# Altium PCB Test.PcbDoc (part 3 of 3)
Units mil, origin at the board's own origin, x right, y up, seen from the top; angles counter-clockwise.
Board outline 6000 x 4000 mil, 2 copper layers (Top Layer, Bottom Layer); 135 components, 102 nets, 575 pads, 1 vias.
Unrouted connection lines stored in the file: 317.
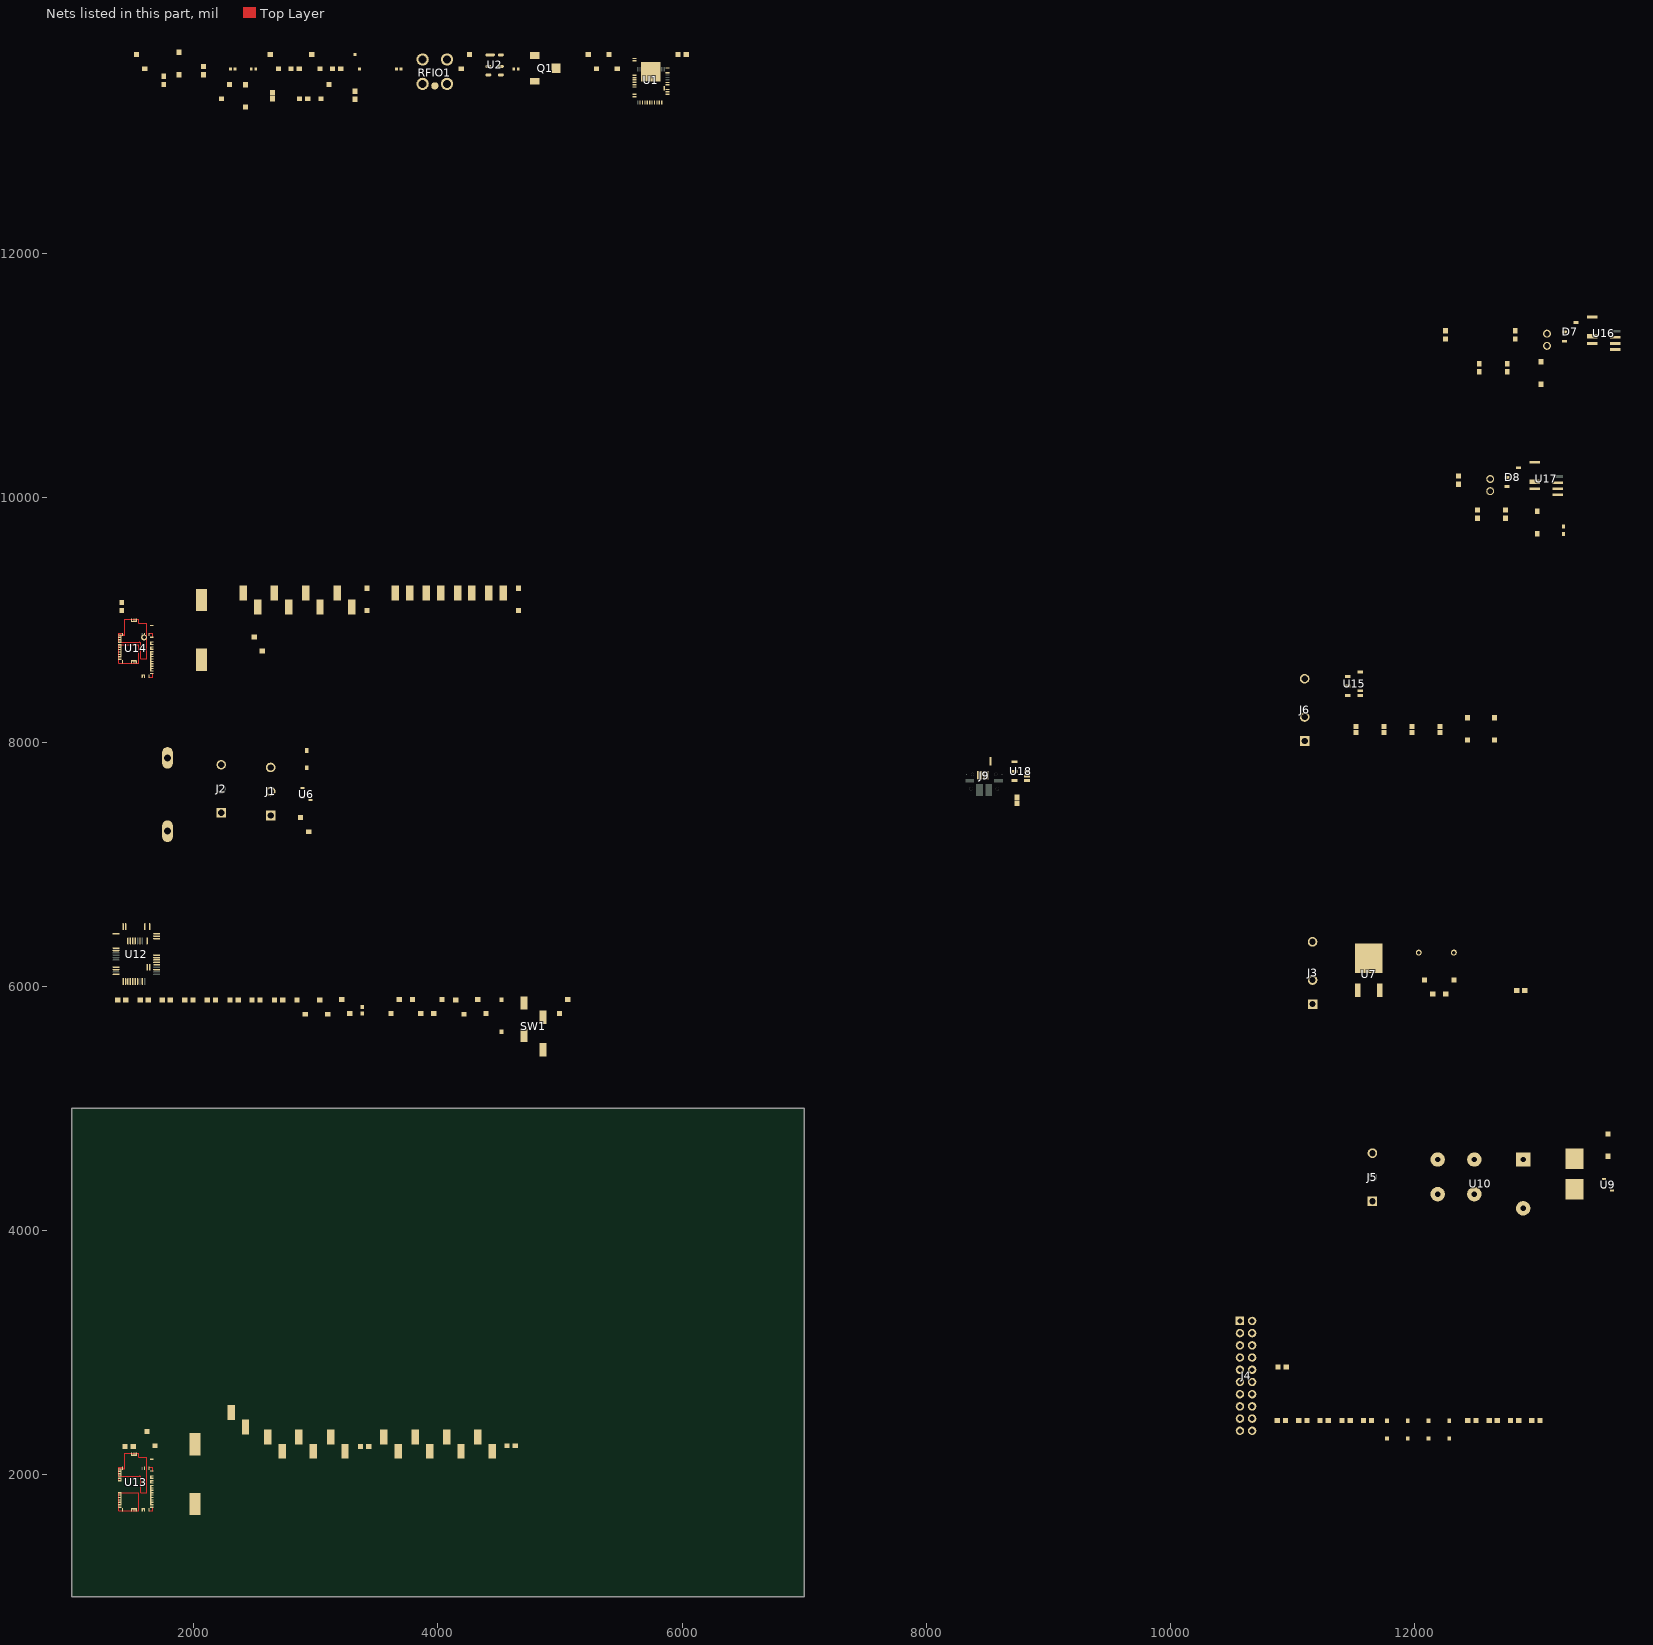
[diagram p2: the nets of this part, all layers, seen from the top]

## Part data (continued)
R1: Case/Package=0603, Case Code (Metric)=1608, Manufacturer=Vishay, Manufacturer Part Number=CRCW0603100KFKEA, Max Operating Temperature=155°C, Max Power Dissipation=100mW, Min Operating Temperature=-55°C, Package Quantity=10, Resistance=100k, Temperature Coefficient=100ppm/°C, Tolerance=1%, Voltage Rating=75V, Case Code (Imperial)=0603, ComponentLink1Description=https://datasheet.ciiva.com/2465/dcrcwe3-2465525.pdf, ComponentLink1URL=https://datasheet.ciiva.com/2465/dcrcwe3-2465525.pdf, ComponentLink2Description=https://datasheet.ciiva.com/7777/1697337-7777269.pdf, ComponentLink2URL=https://datasheet.ciiva.com/7777/1697337-7777269.pdf, ComponentLink3Description=https://datasheet.ciiva.com/15159/getdatasheetpartid-93113-15159925.pdf, ComponentLink3URL=https://datasheet.ciiva.com/15159/getdatasheetpartid-93113-15159925.pdf, ComponentLink4Description=https://datasheet.ciiva.com/46441/1720486-46441605.pdf, ComponentLink4URL=https://datasheet.ciiva.com/46441/1720486-46441605.pdf, ComponentLink5Description=https://datasheet.ciiva.com/2465/dcrcwe3-2465526.pdf, ComponentLink5URL=https://datasheet.ciiva.com/2465/dcrcwe3-2465526.pdf, ComponentLink6Description=https://datasheet.ciiva.com/2465/dcrcwe3-2465527.pdf, ComponentLink6URL=https://datasheet.ciiva.com/2465/dcrcwe3-2465527.pdf, ComponentLink7Description=https://datasheet.ciiva.com/8340/dcrcwe3-8340199.pdf, ComponentLink7URL=https://datasheet.ciiva.com/8340/dcrcwe3-8340199.pdf, ComponentLink8Description=https://datasheet.ciiva.com/16725/70201119-16725223.pdf, ComponentLink8URL=https://datasheet.ciiva.com/16725/70201119-16725223.pdf, ComponentLink9Description=https://datasheet.ciiva.com/8340/dcrcwe3-8340201.pdf, ComponentLink9URL=https://datasheet.ciiva.com/8340/dcrcwe3-8340201.pdf, ComponentLink10Description=https://datasheet.ciiva.com/7791/66915-7791994.pdf, ComponentLink10URL=https://datasheet.ciiva.com/7791/66915-7791994.pdf, ComponentLink11Description=https://datasheet.ciiva.com/5545/dcrcwe3-109170-5545100.pdf, ComponentLink11URL=https://datasheet.ciiva.com/5545/dcrcwe3-109170-5545100.pdf, ComponentLink12Description=https://datasheet.ciiva.com/11809/0900766b80d98afc-11809004.pdf, ComponentLink12URL=https://datasheet.ciiva.com/11809/0900766b80d98afc-11809004.pdf, ComponentLink13Description=https://datasheet.ciiva.com/26317/fld-crcw-e3-data-en-26317165.pdf, ComponentLink13URL=https://datasheet.ciiva.com/26317/fld-crcw-e3-data-en-26317165.pdf, ComponentLink14Description=https://datasheet.ciiva.com/16941/dcrcw-16941311.pdf, ComponentLink14URL=https://datasheet.ciiva.com/16941/dcrcw-16941311.pdf, Composition="Thick Film", Contact Plating=Tin,Lead, Depth=0.85mm, Height=0.45mm, Lead Free="Lead Free", Length=1.55mm, Military Standard=Not, Number of Pins=2, Number of Terminations=2, Packaging="Tape and Reel", Power Rating=100mW, Radiation Hardening=No, REACH SVHC=Unknown, Stock 1=0, Supplier 1="Future Electronics", Supplier Part Number 1=CRCW0603100KFKEA, Termination=SMD/SMT, Voltage Rating (DC)=75V, Weight=7.1E-05oz, Width=0.033inch
R2 R3 R10 R12 R23 R26: Resistance=NC
R4 R5 R17 R18 R19 R20 R21 R27 R28 R31 R34 R35 R36 R37 R38: Case/Package=0603, Case Code (Metric)=1608, Manufacturer=Panasonic, Manufacturer Part Number=ERJ-3EKF1002V, Max Operating Temperature=155°C, Max Power Dissipation=100mW, Min Operating Temperature=-55°C, Package Quantity=1, Resistance=10k, Supplier Part Number 1=P10.0KHTR-ND, Temperature Coefficient=100ppm/°C, Tolerance=1%, Voltage Rating=75V, Case Code (Imperial)=0603, ComponentLink1Description=https://datasheet.ciiva.com/16511/aoa0000ce2-16511861.pdf, ComponentLink1URL=https://datasheet.ciiva.com/16511/aoa0000ce2-16511861.pdf, ComponentLink2Description=https://datasheet.ciiva.com/46372/1678782-46372725.pdf, ComponentLink2URL=https://datasheet.ciiva.com/46372/1678782-46372725.pdf, ComponentLink3Description=https://datasheet.ciiva.com/28514/426256-28514198.pdf, ComponentLink3URL=https://datasheet.ciiva.com/28514/426256-28514198.pdf, ComponentLink4Description=https://datasheet.ciiva.com/9194/aoa0000ce2-9194199.pdf, ComponentLink4URL=https://datasheet.ciiva.com/9194/aoa0000ce2-9194199.pdf, ComponentLink5Description=https://datasheet.ciiva.com/7830/aoa0000ce2-7830729.pdf, ComponentLink5URL=https://datasheet.ciiva.com/7830/aoa0000ce2-7830729.pdf, ComponentLink6Description=https://datasheet.ciiva.com/17212/aoa0000ce2-17212105.pdf, ComponentLink6URL=https://datasheet.ciiva.com/17212/aoa0000ce2-17212105.pdf, ComponentLink7Description=https://datasheet.ciiva.com/30208/aoa0000ce2-30208985.pdf, ComponentLink7URL=https://datasheet.ciiva.com/30208/aoa0000ce2-30208985.pdf, ComponentLink8Description=https://datasheet.ciiva.com/48530/aoa0000ce2-48530988.pdf, ComponentLink8URL=https://datasheet.ciiva.com/48530/aoa0000ce2-48530988.pdf, ComponentLink9Description=https://datasheet.ciiva.com/24070/aoa0000ce2-24070318.pdf, ComponentLink9URL=https://datasheet.ciiva.com/24070/aoa0000ce2-24070318.pdf, ComponentLink10Description=https://datasheet.ciiva.com/16759/70260748-16759807.pdf, ComponentLink10URL=https://datasheet.ciiva.com/16759/70260748-16759807.pdf, Composition="Thick Film", Contact Plating=Tin, Depth=0.8mm, Height=0.45mm, Lead Free="Lead Free", Length=1.6mm, Military Standard=Not, Mount="Surface Mount", Number of Pins=2, Number of Terminations=2, Packaging="Tape and Reel", Power Rating=100mW, Pricing 1="5000=0.00751, 10000=0.00653, 25000=0.00573, 50000=0.00526, 125000=0.00515 (USD)", Radiation Hardening=No, REACH SVHC="No SVHC", Stock 1=0, Supplier 1=Digi-Key, Termination=SMD/SMT, Voltage Rating (DC)=75V, Width=0.031inch
R6: Case/Package=0603, Case Code (Metric)=1608, Manufacturer=Vishay, Manufacturer Part Number=CRCW06036K80FKEA, Max Operating Temperature=155°C, Max Power Dissipation=100mW, Min Operating Temperature=-55°C, Package Quantity=10, Resistance=6.8k, Supplier Part Number 1=541-6.80KHTR-ND, Temperature Coefficient=100ppm/°C, Tolerance=1%, Voltage Rating=75V, Case Code (Imperial)=0603, ComponentLink1Description=https://datasheet.ciiva.com/11811/0900766b80d98afc-11811920.pdf, ComponentLink1URL=https://datasheet.ciiva.com/11811/0900766b80d98afc-11811920.pdf, ComponentLink2Description=https://datasheet.ciiva.com/2465/dcrcwe3-2465684.pdf, ComponentLink2URL=https://datasheet.ciiva.com/2465/dcrcwe3-2465684.pdf, ComponentLink3Description=https://datasheet.ciiva.com/2465/dcrcwe3-2465685.pdf, ComponentLink3URL=https://datasheet.ciiva.com/2465/dcrcwe3-2465685.pdf, ComponentLink4Description=https://datasheet.ciiva.com/2465/dcrcwe3-2465686.pdf, ComponentLink4URL=https://datasheet.ciiva.com/2465/dcrcwe3-2465686.pdf, ComponentLink5Description=https://datasheet.ciiva.com/26314/fld-crcw-e3-data-en-26314745.pdf, ComponentLink5URL=https://datasheet.ciiva.com/26314/fld-crcw-e3-data-en-26314745.pdf, ComponentLink6Description=https://datasheet.ciiva.com/16771/70201119-16771274.pdf, ComponentLink6URL=https://datasheet.ciiva.com/16771/70201119-16771274.pdf, ComponentLink7Description=https://datasheet.ciiva.com/22870/70201119-22870027.pdf, ComponentLink7URL=https://datasheet.ciiva.com/22870/70201119-22870027.pdf, ComponentLink8Description=https://datasheet.ciiva.com/3257/dcrcwe3-3257852.pdf, ComponentLink8URL=https://datasheet.ciiva.com/3257/dcrcwe3-3257852.pdf, ComponentLink9Description=https://datasheet.ciiva.com/7673/1697337-7673148.pdf, ComponentLink9URL=https://datasheet.ciiva.com/7673/1697337-7673148.pdf, ComponentLink10Description=https://datasheet.ciiva.com/3257/dcrcwe3-3257853.pdf, ComponentLink10URL=https://datasheet.ciiva.com/3257/dcrcwe3-3257853.pdf, ComponentLink11Description=https://datasheet.ciiva.com/16508/dcrcwe3-16508431.pdf, ComponentLink11URL=https://datasheet.ciiva.com/16508/dcrcwe3-16508431.pdf, Composition="Thick Film", Contact Plating=Tin, Depth=0.85mm, Height=0.45mm, Lead Free="Lead Free", Length=1.55mm, Military Standard=Not, Number of Terminations=2, Packaging="Tape and Reel", Power Rating=100mW, Pricing 1="5000=0.00497, 10000=0.00432, 25000=0.00405 (USD)", Radiation Hardening=No, REACH SVHC=Unknown, Stock 1=0, Supplier 1=Digi-Key, Termination=SMD/SMT, Voltage Rating (DC)=75V, Weight=7.1E-05oz, Width=0.033inch
R7: Case/Package=0603, Case Code (Metric)=1608, Manufacturer="Vishay Dale", Manufacturer Part Number=CRCW06031R00FKEA, Max Operating Temperature=155°C, Max Power Dissipation=100mW, Min Operating Temperature=-55°C, Package Quantity=10, Resistance=1, Supplier Part Number 1=541-1.00HHTR-ND, Temperature Coefficient=100ppm/°C, Tolerance=1%, Voltage Rating=75V, Case Code (Imperial)=0603, ComponentLink1Description=https://datasheet.ciiva.com/16396/aoa0000ce3-16396837.pdf, ComponentLink1URL=https://datasheet.ciiva.com/16396/aoa0000ce3-16396837.pdf, ComponentLink2Description=https://datasheet.ciiva.com/28691/391509-28691973.pdf, ComponentLink2URL=https://datasheet.ciiva.com/28691/391509-28691973.pdf, ComponentLink3Description=https://datasheet.ciiva.com/16784/70068852-16784839.pdf, ComponentLink3URL=https://datasheet.ciiva.com/16784/70068852-16784839.pdf, ComponentLink4Description=https://datasheet.ciiva.com/9117/aoa0000ce3-9117368.pdf, ComponentLink4URL=https://datasheet.ciiva.com/9117/aoa0000ce3-9117368.pdf, ComponentLink5Description=https://datasheet.ciiva.com/11810/0900766b80eefa12-11810728.pdf, ComponentLink5URL=https://datasheet.ciiva.com/11810/0900766b80eefa12-11810728.pdf, ComponentLink6Description=https://datasheet.ciiva.com/24165/aoa0000ce3-72189-24165336.pdf, ComponentLink6URL=https://datasheet.ciiva.com/24165/aoa0000ce3-72189-24165336.pdf, ComponentLink7Description=https://datasheet.ciiva.com/30060/6aoa0000ce3-30060648.pdf, ComponentLink7URL=https://datasheet.ciiva.com/30060/6aoa0000ce3-30060648.pdf, ComponentLink8Description=https://datasheet.ciiva.com/6138/391509-6138777.pdf, ComponentLink8URL=https://datasheet.ciiva.com/6138/391509-6138777.pdf, ComponentLink9Description=https://datasheet.ciiva.com/16766/70068852-16766778.pdf, ComponentLink9URL=https://datasheet.ciiva.com/16766/70068852-16766778.pdf, ComponentLink10Description=https://datasheet.ciiva.com/16853/aoa0000ce3-16853436.pdf, ComponentLink10URL=https://datasheet.ciiva.com/16853/aoa0000ce3-16853436.pdf, ComponentLink11Description=https://datasheet.ciiva.com/43455/391509-43455868.pdf, ComponentLink11URL=https://datasheet.ciiva.com/43455/391509-43455868.pdf, ComponentLink12Description=https://datasheet.ciiva.com/28547/391509-28547230.pdf, ComponentLink12URL=https://datasheet.ciiva.com/28547/391509-28547230.pdf, ComponentLink13Description=https://datasheet.ciiva.com/7792/1359337-7792119.pdf, ComponentLink13URL=https://datasheet.ciiva.com/7792/1359337-7792119.pdf, ComponentLink14Description=https://datasheet.ciiva.com/2465/dcrcwe3-2465528.pdf, ComponentLink14URL=https://datasheet.ciiva.com/2465/dcrcwe3-2465528.pdf, ComponentLink15Description=https://datasheet.ciiva.com/2465/dcrcwe3-2465529.pdf, ComponentLink15URL=https://datasheet.ciiva.com/2465/dcrcwe3-2465529.pdf, ComponentLink16Description=https://datasheet.ciiva.com/3257/dcrcwe3-3257225.pdf, ComponentLink16URL=https://datasheet.ciiva.com/3257/dcrcwe3-3257225.pdf, ComponentLink17Description=https://datasheet.ciiva.com/2465/dcrcwe3-2465530.pdf, ComponentLink17URL=https://datasheet.ciiva.com/2465/dcrcwe3-2465530.pdf, ComponentLink18Description=https://datasheet.ciiva.com/3257/dcrcwe3-3257226.pdf, ComponentLink18URL=https://datasheet.ciiva.com/3257/dcrcwe3-3257226.pdf, ComponentLink19Description=https://datasheet.ciiva.com/16883/dcrcwe3-16883290.pdf, ComponentLink19URL=https://datasheet.ciiva.com/16883/dcrcwe3-16883290.pdf, ComponentLink20Description=https://datasheet.ciiva.com/16768/70201119-16768957.pdf, ComponentLink20URL=https://datasheet.ciiva.com/16768/70201119-16768957.pdf, ComponentLink21Description=https://datasheet.ciiva.com/28621/1747939-28621389.pdf, ComponentLink21URL=https://datasheet.ciiva.com/28621/1747939-28621389.pdf, ComponentLink22Description=https://datasheet.ciiva.com/5541/dcrcwe3-109170-5541726.pdf, ComponentLink22URL=https://datasheet.ciiva.com/5541/dcrcwe3-109170-5541726.pdf, Composition="Thick Film", Contact Plating=Tin, Depth=0.85mm, Height=0.02inch, Lead Free="Lead Free", Length=1.55mm, Military Standard=Not, Mount="Surface Mount", Number of Pins=2, Number of Terminations=2, Packaging="Tape and Reel", Power Rating=100mW, Pricing 1="5000=0.00497, 10000=0.00432, 25000=0.00405 (USD)", Radiation Hardening=No, REACH SVHC=Unknown, Stock 1=0, Supplier 1=Digi-Key, Termination=SMD/SMT, Voltage Rating (DC)=75V, Weight=7.1E-05oz, Width=0.033inch
R8: Case/Package=0603, Case Code (Metric)=1608, Manufacturer=Vishay, Manufacturer Part Number=CRCW0603110RFKEA, Max Operating Temperature=155°C, Max Power Dissipation=100mW, Min Operating Temperature=-55°C, Package Quantity=10, Resistance=110, Supplier Part Number 1=541-110HTR-ND, Temperature Coefficient=100ppm/°C, Tolerance=1%, Voltage Rating=75V, Case Code (Imperial)=0603, ComponentLink1Description=https://datasheet.ciiva.com/11809/0900766b80d98afc-11809778.pdf, ComponentLink1URL=https://datasheet.ciiva.com/11809/0900766b80d98afc-11809778.pdf, ComponentLink2Description=https://datasheet.ciiva.com/2525/dcrcwe3-2525299.pdf, ComponentLink2URL=https://datasheet.ciiva.com/2525/dcrcwe3-2525299.pdf, ComponentLink3Description=https://datasheet.ciiva.com/2525/dcrcwe3-2525300.pdf, ComponentLink3URL=https://datasheet.ciiva.com/2525/dcrcwe3-2525300.pdf, ComponentLink4Description=https://datasheet.ciiva.com/2525/dcrcwe3-2525301.pdf, ComponentLink4URL=https://datasheet.ciiva.com/2525/dcrcwe3-2525301.pdf, ComponentLink5Description=https://datasheet.ciiva.com/7822/1697337-7822981.pdf, ComponentLink5URL=https://datasheet.ciiva.com/7822/1697337-7822981.pdf, ComponentLink6Description=https://datasheet.ciiva.com/16758/70201119-16758821.pdf, ComponentLink6URL=https://datasheet.ciiva.com/16758/70201119-16758821.pdf, ComponentLink7Description=https://datasheet.ciiva.com/3256/dcrcwe3-3256966.pdf, ComponentLink7URL=https://datasheet.ciiva.com/3256/dcrcwe3-3256966.pdf, ComponentLink8Description=https://datasheet.ciiva.com/7822/1697337-7822982.pdf, ComponentLink8URL=https://datasheet.ciiva.com/7822/1697337-7822982.pdf, ComponentLink9Description=https://datasheet.ciiva.com/3256/dcrcwe3-3256967.pdf, ComponentLink9URL=https://datasheet.ciiva.com/3256/dcrcwe3-3256967.pdf, ComponentLink10Description=https://datasheet.ciiva.com/26316/fld-crcw-e3-data-en-26316567.pdf, ComponentLink10URL=https://datasheet.ciiva.com/26316/fld-crcw-e3-data-en-26316567.pdf, ComponentLink11Description=https://datasheet.ciiva.com/16787/70201119-16787496.pdf, ComponentLink11URL=https://datasheet.ciiva.com/16787/70201119-16787496.pdf, ComponentLink12Description=https://datasheet.ciiva.com/7792/125364-7792010.pdf, ComponentLink12URL=https://datasheet.ciiva.com/7792/125364-7792010.pdf, ComponentLink13Description=https://datasheet.ciiva.com/16885/dcrcwe3-16885194.pdf, ComponentLink13URL=https://datasheet.ciiva.com/16885/dcrcwe3-16885194.pdf, ComponentLink14Description=https://datasheet.ciiva.com/22674/1912744-22674701.pdf, ComponentLink14URL=https://datasheet.ciiva.com/22674/1912744-22674701.pdf, ComponentLink15Description=https://datasheet.ciiva.com/22707/1697337-22707342.pdf, ComponentLink15URL=https://datasheet.ciiva.com/22707/1697337-22707342.pdf, Composition="Thick Film", Contact Plating=Tin, Depth=0.85mm, Height=0.45mm, Lead Free="Lead Free", Length=1.55mm, Military Standard=Not, Mount="Surface Mount", Number of Pins=2, Number of Terminations=2, Packaging="Tape and Reel", Power Rating=100mW, Pricing 1="5000=0.00497, 10000=0.00432, 25000=0.00405 (USD)", Radiation Hardening=No, REACH SVHC=Unknown, Stock 1=35000, Supplier 1=Digi-Key, Termination=SMD/SMT, Voltage Rating (DC)=75V, Weight=7.1E-05oz, Width=0.033inch
R9: Case/Package=Axial, Manufacturer="Stackpole Electronics", Manufacturer Part Number=CFM12JT560R, Max Operating Temperature=155°C, Max Power Dissipation=500mW, Min Operating Temperature=-55°C, Package Quantity=5000, Resistance=560, Supplier Part Number 1=S560HTR-ND, Temperature Coefficient=-400ppm/°C, Tolerance=5%, ComponentLink1Description=https://www.seielect.com/Catalog/SEI-CF_CFM.pdf, ComponentLink1URL=https://www.seielect.com/Catalog/SEI-CF_CFM.pdf, Composition="Carbon Film", Contact Plating=Tin,Matte, Diameter=2.3mm, Lead Free="Lead Free", Length=0.256inch, Mount="Through Hole,Axial", Number of Terminations=2, Packaging="Tape and Reel", Pricing 1="5000=0.00703, 10000=0.00611, 25000=0.00537, 50000=0.00492, 125000=0.00482 (USD)", Radiation Hardening=No, Stock 1=0, Supplier 1=Digi-Key
R11: Case/Package=0603, Case Code (Metric)=1608, Manufacturer=Vishay, Manufacturer Part Number=CRCW060368R0FKEA, Max Operating Temperature=155°C, Max Power Dissipation=100mW, Min Operating Temperature=-55°C, Package Quantity=10, Resistance=68, Supplier Part Number 1=541-68.0HTR-ND, Temperature Coefficient=100ppm/°C, Tolerance=1%, Voltage Rating=75V, Case Code (Imperial)=0603, ComponentLink1Description=https://datasheet.ciiva.com/2494/dcrcwe3-2494368.pdf, ComponentLink1URL=https://datasheet.ciiva.com/2494/dcrcwe3-2494368.pdf, ComponentLink2Description=https://datasheet.ciiva.com/11809/0900766b80d98afc-11809013.pdf, ComponentLink2URL=https://datasheet.ciiva.com/11809/0900766b80d98afc-11809013.pdf, ComponentLink3Description=https://datasheet.ciiva.com/8337/dcrcwe3-8337350.pdf, ComponentLink3URL=https://datasheet.ciiva.com/8337/dcrcwe3-8337350.pdf, ComponentLink4Description=https://datasheet.ciiva.com/7777/1697337-7777608.pdf, ComponentLink4URL=https://datasheet.ciiva.com/7777/1697337-7777608.pdf, ComponentLink5Description=https://datasheet.ciiva.com/16770/70201119-16770904.pdf, ComponentLink5URL=https://datasheet.ciiva.com/16770/70201119-16770904.pdf, ComponentLink6Description=https://datasheet.ciiva.com/2494/dcrcwe3-2494366.pdf, ComponentLink6URL=https://datasheet.ciiva.com/2494/dcrcwe3-2494366.pdf, ComponentLink7Description=https://datasheet.ciiva.com/22870/70201119-22870302.pdf, ComponentLink7URL=https://datasheet.ciiva.com/22870/70201119-22870302.pdf, ComponentLink8Description=https://datasheet.ciiva.com/2494/dcrcwe3-2494367.pdf, ComponentLink8URL=https://datasheet.ciiva.com/2494/dcrcwe3-2494367.pdf, ComponentLink9Description=https://datasheet.ciiva.com/16200/dcrcw-16200591.pdf, ComponentLink9URL=https://datasheet.ciiva.com/16200/dcrcw-16200591.pdf, Composition="Thick Film", Contact Plating=Tin, Depth=0.85mm, Height=0.45mm, Lead Free="Lead Free", Length=1.55mm, Military Standard=Not, Number of Terminations=2, Packaging="Tape and Reel", Power Rating=100mW, Pricing 1="5000=0.00497, 10000=0.00432, 25000=0.00405 (USD)", Radiation Hardening=No, REACH SVHC=Unknown, Stock 1=0, Supplier 1=Digi-Key, Termination=SMD/SMT, Voltage Rating (DC)=75V, Weight=7.1E-05oz, Width=0.033inch
R13 R14 R15 R16 R24 R25: Case/Package=0603, Case Code (Metric)=1608, Manufacturer=Vishay, Manufacturer Part Number=CRCW060322R0FKEA, Max Operating Temperature=155°C, Min Operating Temperature=-55°C, Package Quantity=5000, Power Rating=100mW, Resistance=22R, Supplier Part Number 1=541-22.0HTR-ND, Temperature Coefficient=100ppm/°C, Tolerance=1%, Voltage Rating=75V, Case Code (Imperial)=0603, ComponentLink1Description=https://datasheet.ciiva.com/16382/dcrcwe3-16382261.pdf, ComponentLink1URL=https://datasheet.ciiva.com/16382/dcrcwe3-16382261.pdf, ComponentLink2Description=https://datasheet.ciiva.com/5552/dcrcwe3-109170-5552120.pdf, ComponentLink2URL=https://datasheet.ciiva.com/5552/dcrcwe3-109170-5552120.pdf, ComponentLink3Description=https://datasheet.ciiva.com/22700/1697337-22700361.pdf, ComponentLink3URL=https://datasheet.ciiva.com/22700/1697337-22700361.pdf, ComponentLink4Description=https://datasheet.ciiva.com/11809/0900766b80d98afc-11809067.pdf, ComponentLink4URL=https://datasheet.ciiva.com/11809/0900766b80d98afc-11809067.pdf, ComponentLink5Description=https://datasheet.ciiva.com/7672/1697337-7672876.pdf, ComponentLink5URL=https://datasheet.ciiva.com/7672/1697337-7672876.pdf, ComponentLink6Description=https://datasheet.ciiva.com/15159/getdatasheetpartid-33090-15159388.pdf, ComponentLink6URL=https://datasheet.ciiva.com/15159/getdatasheetpartid-33090-15159388.pdf, ComponentLink7Description=https://datasheet.ciiva.com/7672/1697337-7672877.pdf, ComponentLink7URL=https://datasheet.ciiva.com/7672/1697337-7672877.pdf, ComponentLink8Description=https://datasheet.ciiva.com/26316/fld-crcw-e3-data-en-26316590.pdf, ComponentLink8URL=https://datasheet.ciiva.com/26316/fld-crcw-e3-data-en-26316590.pdf, ComponentLink9Description=https://datasheet.ciiva.com/16893/dcrcw-16893903.pdf, ComponentLink9URL=https://datasheet.ciiva.com/16893/dcrcw-16893903.pdf, Composition="Thick Film", Contact Plating=Tin,Lead, Depth=0.85mm, Height=0.45mm, Lead Free="Lead Free", Length=1.55mm, Military Standard=Not, Mount="Surface Mount", Packaging="Tape and Reel", Pricing 1="5000=0.00497, 10000=0.00432, 25000=0.00405 (USD)", Radiation Hardening=No, REACH SVHC=Unknown, Stock 1=0, Supplier 1=Digi-Key, Termination=SMD/SMT, Voltage Rating (DC)=75V, Weight=7.1E-05oz, Width=0.85mm
R22: Case/Package=0603, Case Code (Metric)=1608, Manufacturer=Vishay, Manufacturer Part Number=CRCW060310R0FKEA, Max Operating Temperature=155°C, Max Power Dissipation=100mW, Min Operating Temperature=-55°C, Package Quantity=10, Supplier Part Number 1=541-10.0HTR-ND, Temperature Coefficient=100ppm/°C, Tolerance=1%, Voltage Rating=75V, Case Code (Imperial)=0603, ComponentLink1Description=https://datasheet.ciiva.com/2465/dcrcwe3-2465699.pdf, ComponentLink1URL=https://datasheet.ciiva.com/2465/dcrcwe3-2465699.pdf, ComponentLink2Description=https://datasheet.ciiva.com/2465/dcrcwe3-2465700.pdf, ComponentLink2URL=https://datasheet.ciiva.com/2465/dcrcwe3-2465700.pdf, ComponentLink3Description=https://datasheet.ciiva.com/11808/0900766b80d98afc-11808660.pdf, ComponentLink3URL=https://datasheet.ciiva.com/11808/0900766b80d98afc-11808660.pdf, ComponentLink4Description=https://datasheet.ciiva.com/2465/dcrcwe3-2465701.pdf, ComponentLink4URL=https://datasheet.ciiva.com/2465/dcrcwe3-2465701.pdf, ComponentLink5Description=https://datasheet.ciiva.com/16740/dcrcwe3-16740661.pdf, ComponentLink5URL=https://datasheet.ciiva.com/16740/dcrcwe3-16740661.pdf, ComponentLink6Description=https://datasheet.ciiva.com/26316/fld-crcw-e3-data-en-26316582.pdf, ComponentLink6URL=https://datasheet.ciiva.com/26316/fld-crcw-e3-data-en-26316582.pdf, ComponentLink7Description=https://datasheet.ciiva.com/16781/70201119-16781847.pdf, ComponentLink7URL=https://datasheet.ciiva.com/16781/70201119-16781847.pdf, ComponentLink8Description=https://datasheet.ciiva.com/3256/dcrcwe3-3256955.pdf, ComponentLink8URL=https://datasheet.ciiva.com/3256/dcrcwe3-3256955.pdf, ComponentLink9Description=https://datasheet.ciiva.com/5547/dcrcwe3-109170-5547342.pdf, ComponentLink9URL=https://datasheet.ciiva.com/5547/dcrcwe3-109170-5547342.pdf, ComponentLink10Description=https://datasheet.ciiva.com/22673/1697337-22673071.pdf, ComponentLink10URL=https://datasheet.ciiva.com/22673/1697337-22673071.pdf, Composition="Thick Film", Contact Plating=Tin, Depth=0.85mm, Height=0.45mm, Lead Free="Lead Free", Length=1.55mm, Military Standard=Not, Mount="Surface Mount", Number of Pins=2, Number of Terminations=2, Packaging="Tape and Reel", Power Rating=100mW, Pricing 1="5000=0.00497, 10000=0.00432, 25000=0.00405 (USD)", REACH SVHC=Unknown, Resistance=10, Stock 1=0, Supplier 1=Digi-Key, Termination=SMD/SMT, Voltage Rating (DC)=75V, Weight=7.1E-05oz, Width=0.033inch
R29: Case/Package=0603, Case Code (Metric)=1608, Manufacturer="Vishay Dale", Manufacturer Part Number=M55342E12B40B2RWS, Max Operating Temperature=150°C, Max Power Dissipation=100mW, Min Operating Temperature=-55°C, Package Quantity=1, Resistance=40.2k, Supplier Part Number 1=M55342E12B40B2RWS-MIL, Temperature Coefficient=25ppm/°C, Tolerance=0.1%, Case Code (Imperial)=0603, ComponentLink1Description=https://datasheet.ciiva.com/16884/crcwhpe3-16884389.pdf, ComponentLink1URL=https://datasheet.ciiva.com/16884/crcwhpe3-16884389.pdf, ComponentLink2Description=https://datasheet.ciiva.com/9010/crcwhpe3-9010219.pdf, ComponentLink2URL=https://datasheet.ciiva.com/9010/crcwhpe3-9010219.pdf, ComponentLink3Description=https://datasheet.ciiva.com/2527/crcwhpe3-2527276.pdf, ComponentLink3URL=https://datasheet.ciiva.com/2527/crcwhpe3-2527276.pdf, ComponentLink4Description=https://datasheet.ciiva.com/2527/crcwhpe3-2527277.pdf, ComponentLink4URL=https://datasheet.ciiva.com/2527/crcwhpe3-2527277.pdf, ComponentLink5Description=https://datasheet.ciiva.com/2527/crcwhpe3-2527278.pdf, ComponentLink5URL=https://datasheet.ciiva.com/2527/crcwhpe3-2527278.pdf, ComponentLink6Description=http://www.vishay.com/docs/60018/eh.pdf, ComponentLink6URL=http://www.vishay.com/docs/60018/eh.pdf, Composition="Thin Film", Failure Rate=0.01%, Height=0.033inch, Length=0.064inch, Number of Terminations=2, Packaging=Tray, Stock 1=0, Supplier 1=Digi-Key, Width=0.032inch
R30: Case/Package=0603, Case Code (Metric)=1608, Manufacturer="TE Connectivity", Manufacturer Part Number=8-2176089-5, Max Operating Temperature=155°C, Max Power Dissipation=167mW, Min Operating Temperature=-55°C, Package Quantity=1, Resistance=88.7k, Supplier Part Number 1=A110295TR-ND, Temperature Coefficient=25ppm/°C, Tolerance=0.1%, Case Code (Imperial)=0603, ComponentLink1Description=https://datasheet.ciiva.com/41810/eng-ds-1773272-j-41810143.pdf, ComponentLink1URL=https://datasheet.ciiva.com/41810/eng-ds-1773272-j-41810143.pdf, ComponentLink2Description=https://datasheet.ciiva.com/41821/eng-ds-1773272-j-41821583.pdf, ComponentLink2URL=https://datasheet.ciiva.com/41821/eng-ds-1773272-j-41821583.pdf, Composition="Thin Film", Height=0.022inch, Length=0.061inch, Number of Terminations=2, Packaging="Tape and Reel", Pricing 1="1000=0.14518, 2000=0.1432 (USD)", Stock 1=0, Supplier 1=Digi-Key, Width=0.031inch
R32: Case/Package=0603, Case Code (Metric)=1608, Manufacturer="TE Connectivity", Manufacturer Part Number=3-2176089-1, Max Operating Temperature=155°C, Max Power Dissipation=167mW, Min Operating Temperature=-55°C, Package Quantity=1000, Power Rating=166mW, Resistance=23.2kR, Supplier Part Number 1=A110239TR-ND, Temperature Coefficient=25ppm/°C, Tolerance=0.1%, Voltage Rating=100V, Case Code (Imperial)=0603, ComponentLink1Description=https://datasheet.ciiva.com/41825/eng-ds-1773272-j-41825125.pdf, ComponentLink1URL=https://datasheet.ciiva.com/41825/eng-ds-1773272-j-41825125.pdf, ComponentLink2Description=https://datasheet.ciiva.com/41807/eng-ds-1773272-j-41807015.pdf, ComponentLink2URL=https://datasheet.ciiva.com/41807/eng-ds-1773272-j-41807015.pdf, ComponentLink3Description=https://datasheet.ciiva.com/41818/eng-ds-1773272-j-41818073.pdf, ComponentLink3URL=https://datasheet.ciiva.com/41818/eng-ds-1773272-j-41818073.pdf, Composition="Thin Film", Height=0.022inch, Length=0.061inch, Mount="Surface Mount", Number of Terminations=2, Packaging="Cut Tape", Pricing 1="1000=0.14518, 2000=0.1432 (USD)", REACH SVHC="No SVHC", Stock 1=1000, Supplier 1=Digi-Key, Voltage Rating (DC)=100V, Width=0.031inch
R33: Case/Package=0603, Case Code (Metric)=1608, Manufacturer="TE Connectivity", Manufacturer Part Number=2176090-2, Max Operating Temperature=155°C, Max Power Dissipation=167mW, Min Operating Temperature=-55°C, Package Quantity=1000, Resistance=133kR, Supplier Part Number 1=A110312TR-ND, Temperature Coefficient=25ppm/°C, Tolerance=0.1%, Case Code (Imperial)=0603, ComponentLink1Description=https://datasheet.ciiva.com/41823/eng-ds-1773272-j-41823608.pdf, ComponentLink1URL=https://datasheet.ciiva.com/41823/eng-ds-1773272-j-41823608.pdf, ComponentLink2Description=https://datasheet.ciiva.com/41810/eng-ds-1773272-j-41810377.pdf, ComponentLink2URL=https://datasheet.ciiva.com/41810/eng-ds-1773272-j-41810377.pdf, ComponentLink3Description=https://datasheet.ciiva.com/41824/eng-ds-1773272-j-41824430.pdf, ComponentLink3URL=https://datasheet.ciiva.com/41824/eng-ds-1773272-j-41824430.pdf, Composition="Thin Film", Depth=0.8mm, Height=0.022inch, Length=0.061inch, Military Standard=Not, Number of Terminations=2, Packaging="Tape and Reel", Pricing 1="1000=0.14518, 2000=0.1432 (USD)", Stock 1=0, Supplier 1=Digi-Key, Width=0.031inch
R39: Case/Package=0603, Case Code (Metric)=1608, Manufacturer=Panasonic, Manufacturer Part Number=ERJ-3EKF1502V, Max Operating Temperature=155°C, Max Power Dissipation=100mW, Min Operating Temperature=-55°C, Package Quantity=1, Resistance=15k, Supplier Part Number 1=P15.0KHTR-ND, Temperature Coefficient=100ppm/°C, Tolerance=1%, Voltage Rating=75V, Case Code (Imperial)=0603, ComponentLink1Description=https://datasheet.ciiva.com/16770/70260748-16770997.pdf, ComponentLink1URL=https://datasheet.ciiva.com/16770/70260748-16770997.pdf, ComponentLink2Description=https://datasheet.ciiva.com/7830/426256-7830982.pdf, ComponentLink2URL=https://datasheet.ciiva.com/7830/426256-7830982.pdf, ComponentLink3Description=https://datasheet.ciiva.com/24026/aoa0000ce2-24026054.pdf, ComponentLink3URL=https://datasheet.ciiva.com/24026/aoa0000ce2-24026054.pdf, ComponentLink4Description=https://datasheet.ciiva.com/6138/aoa0000ce2-6138183.pdf, ComponentLink4URL=https://datasheet.ciiva.com/6138/aoa0000ce2-6138183.pdf, ComponentLink5Description=https://datasheet.ciiva.com/48530/aoa0000ce2-48530983.pdf, ComponentLink5URL=https://datasheet.ciiva.com/48530/aoa0000ce2-48530983.pdf, ComponentLink6Description=https://datasheet.ciiva.com/9193/aoa0000ce2-9193001.pdf, ComponentLink6URL=https://datasheet.ciiva.com/9193/aoa0000ce2-9193001.pdf, ComponentLink7Description=https://datasheet.ciiva.com/16762/70260748-16762729.pdf, ComponentLink7URL=https://datasheet.ciiva.com/16762/70260748-16762729.pdf, ComponentLink8Description=https://datasheet.ciiva.com/22722/426256-22722779.pdf, ComponentLink8URL=https://datasheet.ciiva.com/22722/426256-22722779.pdf, ComponentLink9Description=https://datasheet.ciiva.com/7830/aoa0000ce2-7830732.pdf, ComponentLink9URL=https://datasheet.ciiva.com/7830/aoa0000ce2-7830732.pdf, ComponentLink10Description=https://datasheet.ciiva.com/46372/1678782-46372846.pdf, ComponentLink10URL=https://datasheet.ciiva.com/46372/1678782-46372846.pdf, ComponentLink11Description=https://datasheet.ciiva.com/46372/1678782-46372847.pdf, ComponentLink11URL=https://datasheet.ciiva.com/46372/1678782-46372847.pdf, Composition="Thick Film", Contact Plating=Tin, Depth=0.8mm, Height=0.022inch, Lead Free="Lead Free", Length=1.6mm, Military Standard=Not, Mount="Surface Mount", Number of Pins=2, Number of Terminations=2, Packaging="Tape and Reel", Power Rating=100mW, Pricing 1="5000=0.00751, 10000=0.00653, 25000=0.00573, 50000=0.00526, 125000=0.00515 (USD)", Radiation Hardening=No, REACH SVHC="No SVHC", Stock 1=0, Supplier 1=Digi-Key, Termination=SMD/SMT, Voltage Rating (DC)=75V, Width=0.031inch
RFIO1: "RF Connector SMA Straight PCB Jack Surface Mount 50 Ohm", Part No=132134-15
SW1: Case/Package=SMD/SMT, Contact Current Rating=50mA, Contact Resistance=100mR, IP Rating="IP67,Waterproof,Dust Tight", Manufacturer=Omron, Max Operating Temperature=70°C, Max Voltage Rating (DC)=24V, Min Operating Temperature=-25°C, Operating Force=1.57N, Package Quantity=1, Supplier Part Number 1=SW261TR-ND, ComponentLink1Description=https://datasheet.ciiva.com/1532/en-b3sn-1532676.pdf, ComponentLink1URL=https://datasheet.ciiva.com/1532/en-b3sn-1532676.pdf, ComponentLink2Description=https://datasheet.ciiva.com/16154/en-b3sn-16154998.pdf, ComponentLink2URL=https://datasheet.ciiva.com/16154/en-b3sn-16154998.pdf, ComponentLink3Description=https://datasheet.ciiva.com/2900/b3sn-1110-2900023.pdf, ComponentLink3URL=https://datasheet.ciiva.com/2900/b3sn-1110-2900023.pdf, ComponentLink4Description=https://datasheet.ciiva.com/5283/en-b3sn-371257-5283623.pdf, ComponentLink4URL=https://datasheet.ciiva.com/5283/en-b3sn-371257-5283623.pdf, ComponentLink5Description=https://datasheet.ciiva.com/2900/b3sn-1110-2900024.pdf, ComponentLink5URL=https://datasheet.ciiva.com/2900/b3sn-1110-2900024.pdf, ComponentLink6Description=https://datasheet.ciiva.com/2900/b3sn-1110-2900025.pdf, ComponentLink6URL=https://datasheet.ciiva.com/2900/b3sn-1110-2900025.pdf, ComponentLink7Description=https://datasheet.ciiva.com/15183/getdatasheetpartid-87284-15183738.pdf, ComponentLink7URL=https://datasheet.ciiva.com/15183/getdatasheetpartid-87284-15183738.pdf, ComponentLink8Description=https://datasheet.ciiva.com/30076/en-b3sn-30076973.pdf, ComponentLink8URL=https://datasheet.ciiva.com/30076/en-b3sn-30076973.pdf, Contact Material=Gold, Contact Plating=Gold, Current Rating=50mA, Depth=7mm, Electrical Life=50000Cycles, Height=3.1mm, Illumination Type=Non-Illuminated,Illuminated, Lead Free="Contains Lead", Length=6.5mm, Manufacturer Part Number=B3SN-3012P, Max Current Rating=50mA, Mechanical Life=100000Cycles, Mount="Surface Mount", Number of Poles=1, Orientation=Straight, Packaging="Tape and Reel", Pricing 1="3000=0.52365 (USD)", Radiation Hardening=No, REACH SVHC=Unknown, Stock 1=48000, Supplier 1=Digi-Key, Switch Function=Off-Mom, Switch Travel=0.25mm, Termination=SMD/SMT, Throw Configuration=SPST, Voltage Rating (DC)=24V, Weight=0.007055oz
U1: "SX1211I084"
U4: "DIODE SCHOTTKY 100V 5A", Average Rectified Current=5A, Capacitance=400pF, Forward Voltage=800mV, Manufacturer=Diodes, Manufacturer Part Number=SB5100-T, Max Forward Surge Current (Ifsm)=150A, Max Operating Temperature=150°C, Max Repetitive Reverse Voltage (Vrrm)=100V, Min Operating Temperature=-65°C, Package Quantity=1200, Peak Reverse Current=500uA, ComponentLink1Description=https://datasheet.ciiva.com/914/ds30135-914899.pdf, ComponentLink1URL=https://datasheet.ciiva.com/914/ds30135-914899.pdf, ComponentLink2Description=https://datasheet.ciiva.com/914/ds30135-914900.pdf, ComponentLink2URL=https://datasheet.ciiva.com/914/ds30135-914900.pdf, ComponentLink3Description=https://datasheet.ciiva.com/16331/ds30135-16331957.pdf, ComponentLink3URL=https://datasheet.ciiva.com/16331/ds30135-16331957.pdf, ComponentLink4Description=https://datasheet.ciiva.com/34302/1541853-34302425.pdf, ComponentLink4URL=https://datasheet.ciiva.com/34302/1541853-34302425.pdf, ComponentLink5Description=https://datasheet.ciiva.com/8301/ds30135-8301355.pdf, ComponentLink5URL=https://datasheet.ciiva.com/8301/ds30135-8301355.pdf, ComponentLink6Description=https://datasheet.ciiva.com/26788/sb5100-t-26788846.pdf, ComponentLink6URL=https://datasheet.ciiva.com/26788/sb5100-t-26788846.pdf, Contact Plating=Tin,Bright, Current Rating=5A, Diameter=5.3mm, Element Configuration=Single, Forward Current=5A, Height=5.3mm, Lead Free="Lead Free", Length=9.5mm, Max Reverse Voltage (DC)=100V, Mount="Through Hole", Number of Elements=1, Number of Pins=2, Number of Terminals=2, Output Current=5A, Packaging="Tape and Reel", Peak Non-Repetitive Surge Current=150A, Polarity=Standard, Radiation Hardening=No, Stock 1=0, Supplier 1="Future Electronics", Supplier Part Number 1=SB5100-T, Voltage Rating (DC)=100V, Weight=0.038801oz, Width=5.3mm
U5: "DIODE SCHOTTKY 40V 1A SOD123"
U6 U9: "MOSFET N-CH 20V 630MA SOT-523"
U7: library part FQD1N80TM, "MOSFET N-CH 800V 1A DPAK"
U10: "RELAY GENERAL PURPOSE DPST 8A 3V 67mA coil drive 45ohm coil resistance"
U11: Case/Package=SMD/SMT, Current Rating=2A, DC Cold Resistance=39mR, Manufacturer=Bel, Manufacturer Part Number=SSQ2, Max Operating Temperature=125°C, Min Operating Temperature=-55°C, Supplier Part Number 1=507-1048-2-ND, Voltage Rating (AC)=125V, Approvals=CSA,CE,cULus, ComponentLink1Description=https://datasheet.ciiva.com/300/ssq-300722.pdf, ComponentLink1URL=https://datasheet.ciiva.com/300/ssq-300722.pdf, ComponentLink2Description=https://datasheet.ciiva.com/300/ssq-300723.pdf, ComponentLink2URL=https://datasheet.ciiva.com/300/ssq-300723.pdf, ComponentLink3Description=https://datasheet.ciiva.com/300/ssq-300724.pdf, ComponentLink3URL=https://datasheet.ciiva.com/300/ssq-300724.pdf, Fuse Type="Board Mount (Cartridge Style Excluded)", Height=0.1inch, Length=0.24inch, Mount="Surface Mount", Packaging="Tape and Reel", Pricing 1="1000=0.15908, 2000=0.14847, 3000=0.14582, 5000=0.14317, 10000=0.13787 (USD)", Stock 1=59000, Supplier 1=Digi-Key, Voltage Rating (DC)=125V, Width=0.1inch
U12: library part STM32L433CCTx
U13 U14: "4V to 36V, 2A Step-Down DC/DC Power Module"
U15: "Self-Calibrating, 16-Bit Analog-to-Digital Converter 6-SOT-23 -40 to 85"
U16 U17: "K type thermocouple amplifier"
U18: "2-Channel Ultra Low Clamp Voltage ESD Solution with Series-Resistor Isolation 6-SOT-23 -40 to 85", Package="SOT-23-6 Texas Instruments", Availability=Good, MF="Texas Instruments", MP=TPD2S017DBVR, Price="0.32 USD", SnapEDA_Link=https://www.snapeda.com/parts/TPD2S017DBVR/Texas%20Instruments/view-part/?ref=snap

## Via types
v1: diameter 50, hole 28, Top Layer to Bottom Layer, tented both sides, 1 vias

## Nets (pads, with @x,y where several pads share a name; then routed paths per layer and width w, separated by ;. In a path a pad name is that pad's centre, name@x,y a point inside that pad or via, vN(x,y) a via of type N, cw(c..) or ccw(c..) an arc to the next point about the centre after c; other vN are vias at no path point)
3VSWRelief: U14.9 U14.10 U14.11
"5V PWM": J1.3 U5.C
5VSWRelief: U13.9 U13.10 U13.11
12V: J3.1 U7.4
12VFAN: J1.1 J2.1 U4.C
+3V3: C1.2 C16.2 C17.2 C18.2 C19.2 C20.2 C21.2 C22.2 C23.2 C39.2 C40.2 C41.2 C42.2 C43.2 C48.2 C49.2 C50.2 C51.2 FB1.1 J4.1 R1.2 R4.2 R5.2 R8.1 R10.2 R11.1 R12.2 R22.2 R23.2 R27.2 R32.2 R35.2 R36.2 R37.2 R38.2 U1.26 U12.1 U12.24 U12.36 U12.48 U14.6 U14.7 U14.8 U16.4 U17.4
+5: C44.2 C45.2 C46.2 C47.2 U15.5
+5V: C29.2 C30.2 C31.2 C32.2 C33.2 J6.1 R29.2 U13.6 U13.7 U13.8
+12V: C24.1 C25.2 C26.2 C27.2 C28.2 C34.1 C35.2 C36.2 C37.2 C38.2 U13.2 U13.4 U14.2 U14.4
"AC In": J5.3 U11.1
"AC Out": J5.1 U10.4
DoorSig: J3.2 U7.1
FANGND: J1.2 J2.3 U4.A U5.A
GND: C1.1 C2.1 C3.1 C4.2 C6.1 C7.1 C8.1 C11.2 C14.1 C15.1 C16.1 C17.1 C18.1 C19.1 C20.1 C21.1 C22.1 C23.1 C24.2 C25.1 C26.1 C27.1 C28.1 C30.1 C31.1 C32.1 C33.1 C34.2 C35.1 C36.1 C37.1 C38.1 C40.1 C41.1 C42.1 C43.1 C44.1 C45.1 C46.1 C47.1 C48.1 C49.1 C50.1 C51.1 D2.A D3.A D4.A D5.A D6.A D7.3 D8.3 J3.3 J4.11 J4.12 J4.13 J4.14 J4.15 J4.16 J4.17 J4.18 J4.19 J6.3 J9.5 Q1.2 Q1.4 R3.1 R7.1 R17.1 R18.1 R19.1 R20.1 R21.1 R25.2 R26.1 R28.1 R30.1 R33.1 R39.1 RFIO1.P1 RFIO1.P2 RFIO1.P3 RFIO1.P4 SW1.3 SW1.4 U1.0 U1.1 U1.2 U1.8 U1.9 U1.12 U1.24 U1.25 U1.30 U1.32 U2.1 U2.3 U2.4 U2.6 U6.2 U9.2 U10.5 U10.6 U12.8 U12.23 U12.35 U12.47 U13.5 U13.14 U13.18 U14.5 U14.14 U14.18 U15.2 U15.6 U16.1 U17.1 U18.2
  other v1: 1593.11,8857.09
NetC2_2: C2.2 U1.27
NetC3_2: C3.2 U1.28
NetC4_1: C4.1 Q1.3 U1.11
NetC5_1: C5.1 C6.2 U2.5
NetC5_2: C5.2 L2.1
NetC7_2: C7.2 Q1.1 U1.10
NetC8_2: C8.2 L1.1 L2.2 U1.31
NetC9_1: C9.1 C12.1 U1.6
NetC9_2: C9.2 R6.2 U1.7
NetC10_1: C10.1 R7.2
NetC10_2: C10.2 L1.2 U1.29
NetC11_1: C11.1 L3.1 L4.1 U1.3
NetC12_2: C12.2 R6.1
NetC13_1: C13.1 R16.1 R24.1 U12.7
NetC13_2: C13.2 R25.1
NetC14_2: C14.2 C15.2 FB1.2 U12.9
NetC29_1: C29.1 R29.1 R31.2 U13.15 U13.16
NetC39_1: C39.1 R32.1 R34.2 U14.15 U14.16
NetD1_1: D1.1 R10.1 U12.14
NetD1_2: D1.2 R11.2
NetD2_C: D2.C J4.8 R16.2
NetD3_C: D3.C J4.7 R15.2
NetD4_C: D4.C J4.5 R14.2
NetD5_C: D5.C J4.4 R13.2
NetD6_C: D6.C R23.1 R24.2 SW1.1 SW1.2
NetD7_1: D7.1 FB2.2 U16.2
NetD7_2: D7.2 FB3.2 U16.3
NetD8_1: D8.1 FB4.2 U17.2
NetD8_2: D8.2 FB5.2 U17.3
NetFB2_1: FB2.1 J7.2
NetFB3_1: FB3.1 J7.1
NetFB4_1: FB4.1 J8.2
NetFB5_1: FB5.1 J8.1
NetJ4_2: J4.2 R17.2
NetJ4_3: J4.3 R18.2
NetJ4_6: J4.6 R19.2
NetJ4_9: J4.9 R20.2
NetJ4_10: J4.10 R21.2
NetJ4_20: J4.20 R12.1
NetJ9_2: J9.2 U18.4
NetJ9_3: J9.3 U18.3
NetJ9_4: J9.4 R39.2
NetL3_2: L3.2 U1.4
NetL4_2: L4.2 U1.5
NetR1_1: R1.1 R2.1 U1.20
NetR2_2: R2.2 U12.43
NetR3_2: R3.2 U1.19
NetR4_1: R4.1 U1.14 U12.13
NetR5_1: R5.1 U1.15 U12.12
NetR8_2: R8.2
NetR9_1: R9.1
NetR9_2: R9.2 U7.3
NetR13_1: R13.1 U12.34
NetR14_1: R14.1 U12.37
NetR15_1: R15.1 U12.39
NetR22_1: R22.1 U10.8
NetR26_2: R26.2 U12.38
NetR27_1: R27.1
NetR28_2: R28.2
NetR30_2: R30.2 U13.3
NetR31_1: R31.1 U13.1
NetR33_2: R33.2 U14.3
NetR34_1: R34.1 U14.1
NetR35_1: R35.1 U12.30 U15.3
NetR36_1: R36.1 U12.31 U15.4
NetR37_1: R37.1 U12.18 U16.6
NetR38_1: R38.1 U12.19 U17.6
NetRFIO1_1: RFIO1.1 U2.2
NetSW2_1: U12.44
NetU1_16: U1.16 U12.16
NetU1_17: U1.17 U12.17
NetU1_18: U1.18 U12.15
NetU1_21: U1.21 U12.46
NetU1_22: U1.22 U12.45
NetU1_23: U1.23 U12.29
NetU3_2: U6.3
NetU6_1: U6.1 U12.10
NetU9_1: U9.1 U12.41
NetU9_3: U9.3 U10.1
NetU10_3: U10.3 U11.2
NetU12_21: U12.21 U16.5 U17.5
NetU12_27: U12.27 U16.7 U17.7
NetU12_32: U12.32 U18.6
NetU12_33: U12.33 U18.1
NetU13_12: U13.12 U13.13
NetU14_12: U14.12 U14.13
PSENSOR: J6.2 U15.1
USB5V: J9.1 U18.5
pads on no net: J2.2 J5.2 J9.None J9.P1 J9.P2 J9.P3 J9.P4 J9.P5 J9.P6 U1.13 U1.33 U1.34 U1.35 U1.36 U1.37 U1.38 U1.39 U1.40 U1.41 U1.42 U1.43 U1.44 U1.45 U1.46 U1.47 U1.48 U12.2 U12.3 U12.4 U12.5 U12.6 U12.11 U12.20 U12.22 U12.25 U12.26 U12.28 U12.40 U12.42 U13.17 U14.17 U16.8 U17.8